# Altium PCB PCB.PcbDoc
Units mil, origin at the board's own origin, x right, y up, seen from the top; angles counter-clockwise.
Board outline 5050 x 1495 mil, 2 copper layers (Top Layer, Bottom Layer); 100 components, 60 nets, 241 pads, 18 vias.
Unrouted connection lines stored in the file: 150.
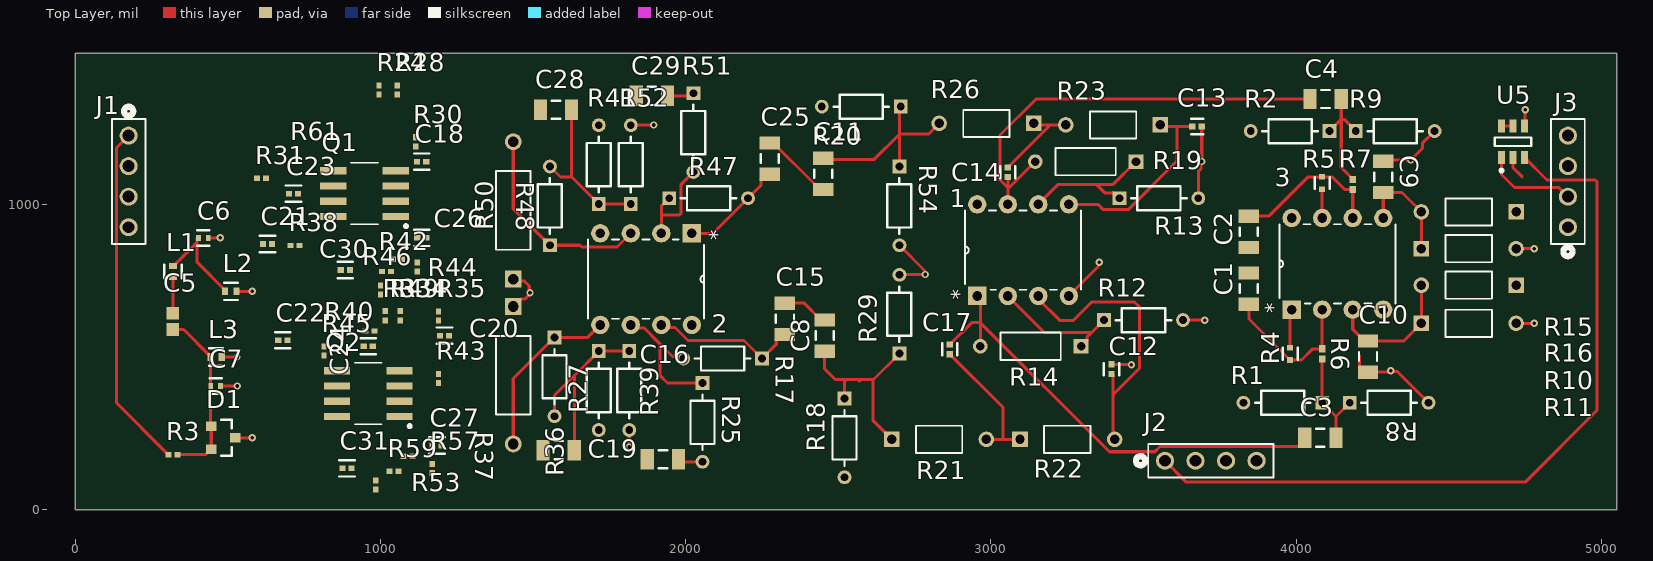
[diagram p0: Top Layer view]
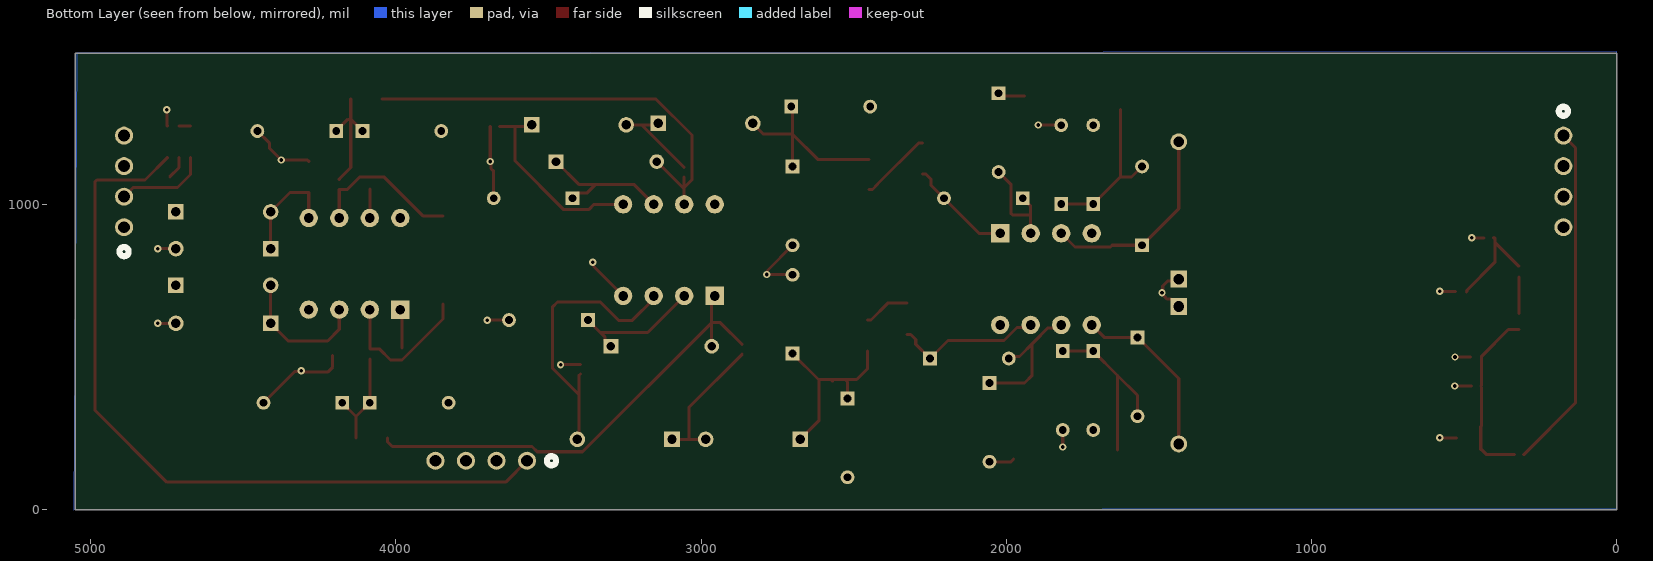
[diagram p1: Bottom Layer view, seen from below]

## Layer stack, top to bottom
Top Solder: solder mask 0.4, Solder Resist, Dk 3.5
Top Layer: signal copper 1.4
Dielectric 1: dielectric 12.6, FR-4, Dk 4.8
Bottom Layer: signal copper 1.4
Bottom Solder: solder mask 0.4, Solder Resist, Dk 3.5

## Board outline
0,0 5050,0 5050,1495 0,1495

## Design rules (kind name [scope] priority, off if disabled: settings)
Clearance [All] p1: gap=10 ignorepadtopadclearanceinfootprint=FALSE except(0: Arc-Hole Track-Hole SMDPad-Hole THPad-Hole Via-Hole Fill-Hole Poly-Hole Region-Hole Text-Hole)
HoleSize [All] p1: absolutevalues=TRUE maxlimit=900 minlimit=12 maxpercent=80.000 minpercent=20.000
MinimumSolderMaskSliver [All] p1: minsoldermaskwidth=1
PolygonConnect [All] p1: connectstyle=Relief reliefconductorwidth=10 reliefentries=4 polygonreliefangle="90 Angle" airgapwidth=10
RoutingVias [All] p1: holewidth=12 width=24 viastyle="Through Hole" minholewidth=12 minwidth=24 maxholewidth=100 maxwidth=200
SilkToSilkClearance [All] p1: silktosilkclearance=0
SilkToSolderMaskClearance [IsPad] p1: minsilkscreentomaskgap=1 clearancetoexposedcopper=TRUE
SolderMaskExpansion [All] p1: expansion=4 istentingtop=FALSE
SupplyNets "Schematic Supply Nets_1" [InNet('GND')] p1: voltage=0.000
SupplyNets "Schematic Supply Nets" [InNet('5V0')] p2: voltage=0.000
Width [All] p1: maxlimit=200 minlimit=10 preferedwidth=10
26 further rules are at their usual default settings.

## Components (designator, comment, footprint, x,y, rotation, side; value= is the part's Value field where it differs from the comment)
1 "LM4562NANOPB" N08E 3305,660 r90 top
2 "LM4562NANOPB" N08E 1670,945 r270 top
3 "LM4562NANOPB" N08E 4335,615 r90 top
C1 "1u" CAPC3216X110X50LL20T25 3845,723.82 r90 top
C2 "1u" CAPC3216X110X50LL20T25 3845,910 r90 top
C3 "1u" CAPC3216X110X50LL20T25 4078.82,235 r0 top
C4 "1u" CAPC3216X110X50LL20T25 4096.18,1345 r180 top
C5 "100p" CAPC1608X90X40ML10T20 320,616.57 r90 top
C6 "390p" FP-GRM155-0_05-MFG 420,890 r0 top
C7 "390p" FP-GRM155-0_05-MFG 460,405 r0 top
C8 "1u" CAPC3216X110X50LL20T25 2455,570 r270 top
C9 "1u" CAPC3216X110X50LL20T25 4285,1090 r90 top
C10 "1u" CAPC3216X110X50LL20T25 4235,501.18 r90 top
C11 "1u" CAPC3216X110X50LL20T25 2450,1100 r270 top
C12 "1.5" FP-C0402-BB-MFG 3395,460 r270 top value="1,500 pF"
C13 "1.5" FP-C0402-BB-MFG 3675,1255 r0 top value="1,500 pF"
C14 "1.5" FP-C0402-BB-MFG 3055,1105 r270 top value="1,500 pF"
C15 "1u" CAPC3216X110X50LL20T25 2325,625 r270 top
C16 "1u" CAPC3216X110X50LL20T25 1925,165 r180 top
C17 "1.5" FP-C0402-BB-MFG 2865,525 r90 top value="1,500 pF"
C18 "0.1u" FP-CL17-IPC_C 1134.9,1140 r0 top
C19 "1u" CAPC3216X110X50LL20T25 1583.82,195 r180 top
C20 "0.1u" FP-CL17-IPC_C 1210,570 r0 top
C21 "0.1u" FP-CL17-IPC_C 629.9,870 r180 top
C22 "0.1u" FP-CL17-IPC_C 680,555 r180 top
C23 "0.1u" FP-CL17-IPC_C 715,1035 r180 top
C24 "0.1u" FP-CL17-IPC_C 959.9,535 r180 top
C25 "1u" CAPC3216X110X50LL20T25 2275,1150 r270 top
C26 "0.1u" FP-CL17-IPC_C 1135.1,890 r0 top
C27 "0.1u" FP-CL17-IPC_C 1185.1,210 r0 top
C28 "1u" CAPC3216X110X50LL20T25 1575,1310 r180 top
C29 "1u" CAPC3216X110X50LL20T25 1888.82,1355 r180 top
C30 "0.1u" FP-CL17-IPC_C 884.9,785 r180 top
C31 "0.1u" FP-CL17-IPC_C 890.1,135 r180 top
D1 "BAT54S-7-F" FP-SOT23-MFG 485,235 r0 top
J1 "PRPC004SAAN-RC" CONN4_PRPC004_SUL 175,1225 r90 top locked
J2 "PRPC004SAAN-RC" CONN4_PRPC004_SUL 3570,160 r180 top locked
J3 "PRPC004SAAN-RC" CONN4_PRPC004_SUL 4890,925 r270 top locked
L1 "2u" FP-LQW15CA_00-MFG 320,780 r90 top
L2 "500n" FP-LQW15CA_00-MFG 510,715 r0 top
L3 "500n" FP-LQW15CA_00-MFG 461.3,500 r0 top
Q1 "HFA3101BZ" M8_15_MFG 947.64,1035 r180 top
Q2 "HFA3101BZ" M8_15_MFG 960,380 r180 top
R1 "CF18JT10K0" FP-CF18-MFG 3955.87,350 r180 top value=10kΩ
R2 "CF18JT10K0" FP-CF18-MFG 3980,1240 r180 top value=10kΩ
R3 "24" RESC1005X40X25LL05T10 319.76,180 r0 top
R4 "ERA-2AEB332X" FP-ERA2A-MFG 3980,510 r270 top
R5 "ERA-2AEB332X" FP-ERA2A-MFG 4085,1070 r90 top
R6 "100" RESC1005X40X25NL05T10 4085,510 r90 top
R7 "100" RESC1005X40X25NL05T10 4185,1065 r90 top
R8 "CF18JT10K0" FP-CF18-MFG 4304.13,350 r0 top value=10kΩ
R9 "CF18JT10K0" FP-CF18-MFG 4324.13,1240 r0 top value=10kΩ
R10 "CF18JT1K00" STA_CF18_STP 4720,735 r180 top
R11 "CF18JT1K00" STA_CF18_STP 4410,610 r0 top
R12 "CF18JT10K0" FP-CF18-MFG 3499.71,620.81 r0 top value=10kΩ
R13 "CF18JT10K0" FP-CF18-MFG 3550,1020 r0 top value=10kΩ
R14 "CMF505K9000FHEB" RES_CMF50_VIS 3295,535 r180 top
R15 "CF18JT1K00" STA_CF18_STP 4720,975 r180 top
R16 "CF18JT1K00" STA_CF18_STP 4410,855 r0 top
R17 "CF18JT10K0" FP-CF18-MFG 2120.87,495 r180 top value=10kΩ
R18 "CF18JT10K0" FP-CF18-MFG 2520,235 r270 top value=10kΩ
R19 "CMF505K9000FHEB" RES_CMF50_VIS 3475,1140 r180 top
R20 "CF18JT10K0" FP-CF18-MFG 2575,1320 r180 top value=10kΩ
R21 "CF18JT1K00" STA_CF18_STP 2675,230 r0 top
R22 "CF18JT1K00" STA_CF18_STP 3095,230 r0 top
R23 "CF18JT1K00" STA_CF18_STP 3555,1260 r180 top
R24 "270" RESC1005X40X25LL05T10 995,1375 r270 top
R25 "CF18JT10K0" FP-CF18-MFG 2055,285.87 r270 top value=10kΩ
R26 "CF18JT1K00" STA_CF18_STP 3140,1265 r180 top
R27 "CF18JT10K0" FP-CF18-MFG 1715,390 r270 top value=10kΩ
R28 "270" RESC1005X40X25LL05T10 1055,1375.24 r90 top
R29 "CF18JT10K0" FP-CF18-MFG 2700,640 r90 top value=10kΩ
R30 "270" RESC1005X40X25LL05T10 1115,1205 r90 top
R31 "270" RESC1005X40X25LL05T10 610,1085 r180 top
R33 "270" RESC1005X40X25LL05T10 1015,635 r270 top
R34 "270" RESC1005X40X25LL05T10 1065,635 r270 top
R35 "270" RESC1005X40X25LL05T10 1190,634.76 r90 top
R36 "CF18JT10K0" FP-CF18-MFG 1570,435 r270 top value=10kΩ
R37 "CF14JT100K" STA_CF14_STP 1435,665 r270 top
R38 "270" RESC1005X40X25LL05T10 719.76,865 r0 top
R39 "CF18JT10K0" FP-CF18-MFG 1815,390 r270 top value=10kΩ
R40 "270" RESC1005X40X25LL05T10 965.24,585 r0 top
R41 "CF18JT10K0" FP-CF18-MFG 1715,1130 r90 top value=10kΩ
R42 "270" RESC1005X40X25LL05T10 1055,820 r180 top
R43 "270" RESC1005X40X25LL05T10 1190,430 r90 top
R44 "270" RESC1005X40X25LL05T10 1120,794.76 r90 top
R45 "270" RESC1005X40X25LL05T10 815,520 r270 top
R46 "270" RESC1005X40X25LL05T10 1020,780 r0 top
R47 "CF18JT10K0" FP-CF18-MFG 2075,1020 r0 top value=10kΩ
R48 "CF18JT10K0" FP-CF18-MFG 1555,995 r90 top value=10kΩ
R49 "270" RESC1005X40X25LL05T10 1000,720 r90 top
R50 "CF14JT100K" STA_CF14_STP 1435,755 r90 top
R51 "CF18JT10K0" FP-CF18-MFG 2025,1235 r270 top value=10kΩ
R52 "CF18JT10K0" FP-CF18-MFG 1820,1130 r90 top value=10kΩ
R53 "270" RESC1005X40X25LL05T10 1090,175 r0 top
R54 "CF18JT10K0" FP-CF18-MFG 2700,995 r270 top value=10kΩ
R57 "270" RESC1005X40X25LL05T10 1170,135 r90 top
R59 "270" RESC1005X40X25LL05T10 1045,125 r0 top
R61 "270" RESC1005X40X25LL05T10 985,79.76 r90 top
U5 "TPS22810TDBVRQ1" FP-DBV0006A-MFG 4710,1205 r90 top locked

## Footprints (in the part's own frame and the unit in brackets; to place one, negate y for a bottom-side part, rotate by r counter-clockwise, add the part's x,y. Pads: shape width x height; smd on the part's side, far side on the other; paste and mask are expansions set on the pad)
CAPC1608X90X40ML10T20 [mm] "Chip Capacitor, 2-Leads, Body 1.7x0.9mm, IPC Low Density"
  rect 1.05x1.05 smd: 1(-0.675,0) 2(0.675,0)
  body extent -0.85,-0.45 0.85,0.45, height 0.9
CAPC3216X110X50LL20T25 [mm] "Chip Capacitor, 2-Leads, Body 3.20x1.60mm, IPC High Density"
  rect 1.1x1.7 smd: 1(-1.3,0) 2(1.3,0)
  silkscreen extent -0.35,-0.75 0.35,0.75, body extent -1.7,-0.9 1.7,0.9, height 1.1
CONN4_PRPC004_SUL [mil]
  round 59 / inner round 60 / far side round 59 hole 39 paste-99999 mask+0: 1(0,0) 2(-100,0) 3(-200,0) 4(-300,0)
  silkscreen extent -355,-55 95,55
FP-C0402-BB-MFG [mm]
  rect 0.52x0.52 smd paste+0 mask+0: 1(-0.4,0) 2(0.4,0)
  silkscreen extent -0.5,-0.64 0.5,0.64, body extent -0.8,-0.4 0.8,0.4, height 0.25
FP-CF18-MFG [mm]
  rect 1.15x1.15 hole 0.65 paste-2539.97 mask+0: 1(-3.28,0)
  round 1.15 hole 0.65 paste-2539.97 mask+0: 2(3.28,0)
  silkscreen extent -2.3,-1 2.3,1, body extent -3.96,-1.1 3.96,1.1, height 0.25
FP-CL17-IPC_C [mil]
  rect 20.29x18.6 smd paste+0 mask+0: 1(-14.9,0) 2(14.9,0)
  silkscreen extent -25,-27 25,27, body extent -29,-15 29,15, height 10
FP-DBV0006A-MFG [mm]
  rrect17% 1.1x0.6 smd paste+0 mask+0: 1(-1.3,0.95) 2(-1.3,0) 3(-1.3,-0.95) 4(1.3,-0.95) 5(1.3,0) 6(1.3,0.95)
  silkscreen extent -2.52,-1.53 0.35,1.53, body extent -1.95,-1.78 1.95,1.78, height 0.25
FP-ERA2A-MFG [mm]
  rect 0.475x0.5 smd paste+0 mask+0: 1(-0.512,0) 2(0.512,0)
  silkscreen extent -0.5,-0.63 0.5,0.63, body extent -0.85,-0.4 0.85,0.4, height 0.25
FP-GRM155-0_05-MFG [mm]
  rect 0.4x0.5 smd paste+0 mask+0: 1(-0.4,0) 2(0.4,0)
  silkscreen extent -0.5,-0.65 0.5,0.65, body extent -0.7,-0.38 0.7,0.38, height 0.25
FP-LQW15CA_00-MFG [mm]
  rect 0.5x0.64 smd paste+0 mask+0: 1(-0.475,0) 2(0.475,0)
  silkscreen extent -0.56,-0.73 0.56,0.73, body extent -0.82,-0.42 0.82,0.42, height 0.25
FP-SOT23-MFG [mm]
  rect 0.9x0.8 smd paste+0 mask+0: 1(-1,0.95) 2(-1,-0.95) 3(1,0)
  silkscreen extent -0.18,-1.5 0.7,1.5, body extent -1.55,-1.6 1.55,1.6, height 0.25
M8_15_MFG [mm] "Recommended Land Pattern"
  rect 2.2x0.6 smd: 1(-2.6,1.905) 2(-2.6,0.635) 3(-2.6,-0.635) 4(-2.6,-1.905) 5(2.6,-1.905) 6(2.6,-0.635) 7(2.6,0.635) 8(2.6,1.905)
  silkscreen extent -3.58,-2.56 1.13,2.83, body extent -3.8,-2.75 3.8,2.75, height 0.25
N08E [mil]
  rect 60x60 / inner round 60 / far side rect 60x60 hole 32 paste-99999 mask-30: 1(40,350)
  round 60 hole 32 paste-99999 mask-30: 2(40,250) 3(40,150) 4(40,50) 5(340,50) 6(340,150) 7(340,250) 8(340,350)
  silkscreen extent 60,10 320,390, body extent 20,15 340,395, height 215
RES_CMF50_VIS [mil]
  rect 48x48 / inner round 60 / far side rect 48x48 hole 28 paste-99999 mask+0: 1(0,0)
  round 48 / inner round 60 / far side round 48 hole 28 paste-99999 mask+0: 2(330,0)
  silkscreen extent 66,-45 264,45, body extent -9,-40 339,40, height 80
RESC1005X40X25LL05T10 [mm] "Chip Resistor, 2-Leads, Body 1.00x0.50mm, IPC High Density"
  rect 0.5x0.45 smd: 1(-0.375,0) 2(0.375,0)
  body extent -0.53,-0.27 0.53,0.28, height 0.4
RESC1005X40X25NL05T10 [mm] "Chip Resistor, 2-Leads, Body 1.00x0.50mm, IPC Medium Density"
  rect 0.6x0.55 smd: 1(-0.425,0) 2(0.425,0)
  body extent -0.53,-0.27 0.53,0.28, height 0.4
STA_CF14_STP [mil]
  rect 55x55 / inner round 60 / far side rect 55x55 hole 35 paste-99999 mask+0: 1(0,0)
  round 55 / inner round 60 / far side round 55 hole 35 paste-99999 mask+0: 2(450,0)
  silkscreen extent 96,-56 354,57, body extent -12,-51 462,51, height 103
STA_CF18_STP [mil]
  rect 51x51 / inner round 60 / far side rect 51x51 hole 31 paste-99999 mask+0: 1(0,0)
  round 51 / inner round 60 / far side round 51 hole 31 paste-99999 mask+0: 2(310,0)
  silkscreen extent 79,-44 231,45, body extent -11,-39 321,39, height 79

## Part data
1 2 3: "No Description Available", Mfr_Name="Texas Instruments", RefDes=RefDes, Type=Type
C1 C2 C3 C4 C8 C9 C10 C11 C15 C16 C19 C25 C28 C29: library part CMP-2000-06011-1, "Chip Capacitor, 1 uF, +/- 10%, 50 V, -55 to 125 degC, 1206 (3216 Metric), RoHS, Tape and Reel", Capacitance=1uF, Capacitance - nF=1000nF, Case Code - in=1206, Case Code - mm=3216, Case Height=1mm, Case Length=3.2mm, Case Width=1.6mm, Dielectric=X7R, Manufacturer=Kemet, Maximum Operating Temperature=+125C, Minimum Operating Temperature=-55C, Operating Temperature Range=-55Cto+125C, Package / Case=1206(3216metric), Package Description="2-Pin Surface Mount Device, Body 3.2 x 1.6 mm", Temperature Coefficient / Code=+/-15%, Tolerance=10%, Voltage Rating=50V, Brand=Kemet, Class=Class1, Datasheet URL=http://www.kemet.com/docfinder?Partnumber=C1206C105K5RACTU, Datasheet Version=02/2016, Dimensions=1.6mmWx3.2mmLx1mmH, Factory Pack Quantity=2500, Manufacturer URL=http://www.kemet.com/, Mounting Technology=SurfaceMount, Package Reference=1206, Packaging=Reel, Product=GeneralTypeMLCCs, Product Category=MultilayerCeramicCapacitorsMLCC-SMD/SMT, RoHS=Details, Series=C1206C, Termination Style=SMD/SMT, Type=SMDMLCCX7R6.3-250VDCCommericalGrade, Voltage Rating DC=50V
C5: library part CMP-2100-03594-1, "Chip Capacitor, 100 pF, +/- 5%, 50 V, -55 to 125 degC, 0603 (1608 Metric), RoHS, Tape and Reel", Capacitance=100pF, Case Code (Imperial)=0603, Case Code (Metric)=1608, Dielectric=C0G, Insulation Resistance=100GR, Manufacturer=Yageo, Max Operating Temperature=125degC, Min Operating Temperature=-55degC, Package Description="2-Pin Surface Mount Device, Body 1.6 x 0.8 mm", Package Quantity=1, Temperature Coefficient=30ppm/degC, Tolerance=5%, Voltage=50V, Case/Package=0603, Composition=Ceramic, Datasheet URL=http://www.yageo.com/documents/recent/UPY-GP_NP0_16V-to-50V_14.pdf, Datasheet Version="Rev. 14, 07/2016", Depth=0.8mm, Height=0.8mm, Lead Free=LeadFree, Length=1.6mm, Manufacturer URL=http://www.yageo.com/, Mount=SurfaceMount, Number of Pins=2, Package Reference=0603, Packaging=TapeandReel, Radiation Hardening=No, REACH SVHC=Unknown, RoHSCompliant=True, Termination=SMD/SMT, Thickness=0.035inch, Voltage Rating=50V, Voltage Rating (DC)=50V, Width=0.8mm
C6 C7: library part CMP-2008-04345-2, "Chip Multilayer Ceramic Capacitors for General Purpose, 0402, 390pF, C0G, 30ppm/°C, 5%, 50V", Capacitance=390pF, Case Code (Imperial)=0402, Case Code (Metric)=1005, Dielectric=C0G, Max Operating Temperature=125°C, Min Operating Temperature=-55°C, Package Quantity=1, Temperature Coefficient=30ppm/°C, Tolerance=5%, Voltage=50V, Case/Package=0402, Depth=0.5mm, Height=0.5mm, Lead Free="Lead Free", Length=1mm, Material=Ceramic, Mount="Surface Mount", Packaging="Tape and Reel", Radiation Hardening=No, REACH SVHC="No SVHC", Termination=SMD/SMT, Thickness=0.022inch, Voltage Rating=50V, Voltage Rating (DC)=50V, Width=0.02inch
C12 C13 C14 C17: library part CMP-2008-03106-2, "CAP CER 1500PF 50V NP0 0402", Capacitance="1,500 pF", Manufacturer=Kemet, Manufacturer Part Number=C0402C152J5GACTU, Package=C0402-BB, Temperature="-55°C to +125°C", Temperature Characteristic=C0G, Temperature Coefficient=15%, Temperature Range High=+125°C, Temperature Range Low=-55°C, Tolerance=0.05, Voltage Rating="50 V", Automotive=No, Category=Cap, ComponentLink2Description=Datasheet, ComponentLink2URL=https://content.kemet.com/datasheets/KEM_C1002_X7R_SMD.pdf, Device Class L1="Passive Components", Device Class L2=Capacitors, Device Class L3="Ceramic Capacitors", Digikey Description="CAP CER 1500PF 50V NP0 0402", Height=0.55mm, Ipc Land Pattern Name=CAPC10050X50, Lead Free=Yes, Material=Ceramic, Mouser Description="Multilayer Ceramic Capacitors MLCC - SMD/SMT 50V 0.0015uF 5% C0G", Octopart=https://octopart.com/c0402c152j5gactu-kemet-12793166, RoHS=TRUE
C18 C20 C21 C22 C23 C24 C26 C27 C30 C31: library part CMP-13271-001069-1, "Cap Ceramic 100nF 10V X7R ±10% SMD 0402 +125°C Paper T/R", Capacitance=100nF, Case Code (Imperial)=0402, Case Code (Metric)=1005, Dielectric=X7R, Max Operating Temperature=125°C, Min Operating Temperature=-55°C, Package Quantity=1, Tolerance=10%, Voltage Rating=10V, Case/Package=0402, Contact Plating=Tin, Depth=0.5mm, Height=0.5mm, Length=1mm, Mount="Surface Mount", Packaging="Tape and Reel", Radiation Hardening=No, Thickness=0.022inch, Width=0.02inch
D1: library part CMP-1667-00006-2, "DIODE ARRAY SCHOTTKY 30V SOT23-3", Average Rectified Current=200mA, Capacitance=10pF, Case/Package=SOT-23, Forward Voltage=800mV, Max Forward Surge Current (Ifsm)=600mA, Max Operating Temperature=150°C, Max Power Dissipation=200mW, Max Repetitive Reverse Voltage (Vrrm)=30V, Min Operating Temperature=-65°C, Package Quantity=3000, Peak Reverse Current=2uA, Contact Plating=Tin, Current Rating=200mA, Forward Current=200mA, Height=1mm, Lead Free="Lead Free", Length=2.9mm, Max Reverse Voltage (DC)=30V, Mount="Surface Mount", Number of Pins=3, Packaging="Tape and Reel", Peak Non-Repetitive Surge Current=600mA, Power Dissipation=200mW, Power Rating=200mW, Radiation Hardening=No, REACH SVHC="No SVHC", Reverse Recovery Time=5ns, Termination=SMD/SMT, Voltage Rating (DC)=30V, Weight=0.000282oz, Width=1.3mm
J1 J2 J3: "No Description Available", Mfr_Name=Sullins, RefDes=RefDes, Type="Headers, Male Pins"
L1: library part CMP-06042-013572-1, "Wire Wound Ferrite Inductor for General Circuits 2000nH ±10% 130mA 3.2Ω 0402 (1005)", Case/Package=Nonstandard, Current Rating=130mA, DC Resistance (DCR)=3.2R, Inductance=2uH, Max Operating Temperature=125°C, Min Operating Temperature=-40°C, Resistor Type=Wirewound, Self Resonant Frequency=120MHz, Test Frequency=10MHz, Tolerance=10%, Core Material=Ferrite, Height - Seated (Max)=0.026inch, Length=0.04inch, Mount="Surface Mount", Packaging="Tape and Reel", Shielding=Unshielded, Width=0.022inch
L2 L3: library part CMP-06042-006025-1, "Wire Wound Ferrite Inductor for General Circuits 500nH ±5% 270mA 0.97Ω 0402 (1005)", Case/Package=Nonstandard, Current Rating=270mA, DC Resistance (DCR)=970mR, Inductance=500nH, Max Operating Temperature=125°C, Min Operating Temperature=-40°C, Resistor Type=Wirewound, Self Resonant Frequency=900MHz, Test Frequency=10MHz, Tolerance=5%, Core Material=Ferrite, Height - Seated (Max)=0.026inch, Length=0.04inch, Mount="Surface Mount", Packaging="Cut Tape", Shielding=Unshielded, Width=0.022inch
Q1 Q2: library part CMP-00572-88252381-1, "HFA3096 Series NPN 12 Vce 10 Ghz UHF Transistor Array - SOIC-8", Case/Package=SOIC, Collector Base Voltage (VCBO)=12V, Collector Emitter Breakdown Voltage=8V, Continuous Collector Current=30mA, Emitter Base Voltage (VEBO)=5.5V, Manufacturer Lifecycle Status=ACTIVE, Max Frequency=10GHz, Max Operating Temperature=85°C, Min Operating Temperature=-40°C, Bandwidth=900MHz, Collector Emitter Voltage (VCEO)=8V, ComponentLink1Description="Manufacturer's Website", ComponentLink1URL=http://www.renesas.com, ComponentLink2Description="Datasheet URL", ComponentLink2URL=https://octopart.com/cad-content/api/get-model-datasheet/15189/88252381, ComponentLink3Description="Manufacturer's Package Drawing", ComponentLink3URL=https://www.renesas.com/en/document/psc/m815-8-lead-narrow-body-small-outline-plastic-package, Contact Plating=Tin, Current Rating=30mA, Gain Bandwidth Product=10GHz, Height=0m, HelpURL=https://octopart.com/cad-content/api/get-model-datasheet/15189/88252381, Lead Free="Lead Free", Length=4.9mm, Lifecycle Status=Production, Max Collector Current=30mA, Mount="Surface Mount", Noise Figure=3.5dB, Number of Pins=8, Packaging=Bulk, Pitch=1.3mm, Polarity=NPN, Radiation Hardening=No, REACH SVHC="No SVHC", RoHS=Compliant, Schedule B=8542330000, Transition Frequency=10GHz, Voltage Rating (DC)=8V, Width=3.9mm
R1 R2 R8 R9 R12 R13 R17 R18 R20 R25 R27 R29 R36 R39 R41 R47 R48 R51 R52 R54: library part CMP-26528-000002-1, "RES 10K OHM 1/8W 5% CF AXIAL", Manufacturer="Stackpole Electronics", Package=CF18, Power Rating=0.125W, Resistance=10kΩ, Temperature="-55°C to +155°C", Temperature Coefficient=0-500ppm/°C, Temperature Range High=+155°C, Temperature Range Low=-55°C, Tolerance=5%, Voltage Rating=250V, Automotive=No, Category=Res, ComponentLink2Description=Datasheet, ComponentLink2URL=http://www.seielect.com/Catalog/SEI-CF_CFM.pdf, Composition="Carbon Film", Device Class L1="Passive Components", Device Class L2=Resistors, Device Class L3="Through-Hole Resistors", Digikey Description="RES 10K OHM 1/8W 5% CF AXIAL", Height=2mm, Ipc Land Pattern Name=RESAD656W65L360D200, Lead Free=Yes, Manufacturer Part Number=CF18JT10K0, Octopart=https://octopart.com/cf18jt10k0-stackpole+electronics-19205642, RoHS=TRUE, Series=CF
R3: library part CMP-1011-00035-2, Manufacturer=Yageo, Part Number=RC0402JR-0724RL
R4 R5: library part CMP-2002-05884-2, Case Code (Imperial)=0402, Case Code (Metric)=1005, Max Operating Temperature=155°C, Max Power Dissipation=63mW, Min Operating Temperature=-55°C, Resistance=3.3kΩ, Temperature Coefficient=25ppm/°C, Tolerance=0.1%, Voltage Rating=25V, Case/Package=0402, Composition="Thin Film", Contact Plating=Tin, Depth=500µm, Height=350µm, Lead Free="Lead Free", Length=1mm, Lifecycle Status=Production, Military Standard=Not, Mount="Surface Mount", NexarPartId=9251384, Number of Pins=2, Number of Terminations=2, Packaging="Cut Tape", Power Rating=63mW, Radiation Hardening=No, REACH SVHC="No SVHC", RoHS=Compliant, Schedule B="8533210045, 8533210045", Termination=SMD/SMT, Voltage Rating (DC)=25V, Weight=793.786648µg, Width=500µm
R6 R7: library part CMP-2002-07914-1, Manufacturer="Yageo / Phycomp", Part Number=RC0402JR-07100RL
R10 R11 R15 R16 R21 R22 R23 R26 R37 R50: "No Description Available", Mfr_Name="Stackpole International"
R14 R19: "No Description Available", Mfr_Name=Vishay
R24 R28 R30 R31 R33 R34 R35 R38 R40 R42 R43 R44 R45 R46 R49 R53 R57 R59 R61: library part CMP-2002-07003-1, Manufacturer="Yageo / Phycomp", Part Number=RC0402FR-07270RL
U5: library part CMP-04910-000007-2, "IC PWR SWITCH N-CHAN 1:1 SOT23-6", Case/Package=SOT-23-6, Max Operating Temperature=105°C, Max Output Current=2A, Max Supply Voltage=18V, Min Operating Temperature=-40°C, Min Supply Voltage=2.7V, Package Quantity=3000, Fault Protection="Over Temperature", Interface=On/Off, Number of Channels=1, Number of Outputs=1, Output Configuration="High Side", Packaging="Cut Tape", RoHS Compliant=Yes, Series=TPS22810-Q1, Weight=0.000801oz

## Via types
v1: diameter 24, hole 12, Top Layer to Bottom Layer, 18 vias

## Nets (pads, with @x,y where several pads share a name; then routed paths per layer and width w, separated by ;. In a path a pad name is that pad's centre, name@x,y a point inside that pad or via, vN(x,y) a via of type N, cw(c..) or ccw(c..) an arc to the next point about the centre after c; other vN are vias at no path point)
5V0: 1.8 2.8 3.8 R1.2 R2.2 R10.1 R15.1 R18.2 R20.2 R24.1 R27.2 R28.1 R30.2 R33.1 R34.1 R35.2 R41.2 U5.5 U5.6 | length 37.4
  Top Layer w10: U5.6 U5.5
5V_POWER: J3.2 U5.1 | length 303.8
  Top Layer w10: U5.1 4672.6,1097.4 4715,1055 4860,1055 J3.2
GND: 1.4 2.4 3.4 C6.2 C7.2 C9.2 C10.1 C12.1 C13.2 C18.2 C20.2 C23.2 C24.2 C26.2 C27.2 D1.3 J1.3 J1.4 J2.4 J3.4 L2.2 L3.2 R8.2 R9.2 R11.2 R12.2 R13.2 R16.2 R29.2 R37.1 R39.2 R44.1 R49.1 R50.1 R52.2 R54.2 R57.1 R61.1 U5.2 U5.4 | length 2077.4
  Top Layer w10: C6.2 v1(475,890) ; C7.2 v1(530.75,405) ; L3.2 v1(530,500) ; D1.3@526.34,235 D1.3 v1(580,235) ; L2.2 v1(580,715) ; R37.1 1460,690 1474.15,690 1477.5,693.35 1477.5,693.71 1490,706.21 v1(1490,710) 1487.32,712.68 1487.32,732.68 1471.64,748.36 1441.64,748.36 R50.1 ; v1(1815,205) R39.2 ; R52.2 1820.43,1259.57 1894.57,1259.57 v1(1895,1260) ; R29.2 2700.43,769.57 2784.57,769.57 v1(2785,770) 2782.32,772.68 2782.32,783.54 R54.2 ; 1.4 3352.32,797.32 3352.32,807.32 v1(3355,810) ; C12.1 3395.37,475.37 3459.63,475.37 v1(3460,475) ; R12.2 3629.25,620.41 3699.59,620.41 v1(3700,620) ; R13.2 3679.13,1108.37 3687.7,1116.94 3687.7,1137.7 v1(3690.37,1140.37) 3690.37,1254.63 C13.2 ; 4206.54,504.5 4206.54,466.65 4223.19,450 C10.1 4301.21,450 4306.21,455 v1(4310,455) 4312.68,452.32 4330.95,452.32 R8.2 ; C9.2 4288.82,1145 v1(4375,1145) 4413.05,1183.05 4413.05,1199.78 R9.2 ; U5.2 4710,1120 4740,1090 ; R11.2 v1(4780,610) ; R16.2 v1(4780,855) ; U5.4 4748.7,1257.48 4748.7,1308.7 v1(4750,1310)
IF_0: C8.1 C15.1 | length 152.8
  Top Layer w10: C15.1 2388.19,676.18 2443.19,621.18 C8.1
IF_0_1: C16.2 Q1.5 R28.2
IF_0_2: C19.2 Q1.6 R24.2
IF_90: C11.2 C25.1 | length 238.7
  Top Layer w10: C25.1 2286.81,1201.18 2421.54,1066.46 2421.54,1065.47 2438.19,1048.82 C11.2
IF_90_1: C29.2 Q2.5 R34.2
IF_90_2: C28.2 Q2.6 R33.2
IF_L0: 1.1 C3.1 C17.2 R14.2 | length 1562.5
  Top Layer w10: C17.2 2936.75,612.5 2965,612.5 ; 1.1 2965,690 2965,612.5 ; R14.2 2965,612.5 ; C3.1 4027.64,223.19 4010.98,206.54 3553.6,206.54 3536.57,189.5 3388,189.5 2965,612.5
IF_L90: 1.7 C4.2 C14.2 R19.2 | length 1461
  Top Layer w10: 1.7 3055,1055 ; C14.2 3055,1055 ; R19.2 3060,1055 3055,1055 ; C4.2 3147.79,1345 3029.76,1226.98 3029.76,1080.24 3055,1055
L0_F1_0: C30.2 J2.2
L0_F1_90: C31.2 J2.3
Net1_2: 1.2 R12.1 R14.1 | length 450.5
  Top Layer w10: 1.2 3174.88,580.12 3329.88,580.12 ; R14.1 3314,554 3314,564.24 3329.88,580.12 ; R12.1 3374.19,620.81 3375,620 3369.76,620 3329.88,580.12
Net1_3: 1.3 C12.2 R22.2 | length 943.5
  Top Layer w10: 1.3 3155,690 3225,620 3270,620 3330,680 3470,680 3487,663 3487,463.82 3400,376.82 ; C12.2 3400,439.25 3400,376.82 ; R22.2 3400,235 3400,376.82
Net1_5: 1.5 C13.1 R23.1 | length 647.2
  Top Layer w10: 1.5 3350.3,1000 3367.94,982.36 3449.72,982.36 3609.63,1142.27 3609.63,1255 ; R23.1 3560,1255 3609.63,1255 ; C13.1 3609.63,1255
Net1_6: 1.6 R13.1 R19.1 | length 472.6
  Top Layer w10: 1.6 3220.28,1065.28 3345,1065.28 ; R13.1 3403.23,1037.64 3372.65,1037.64 3345,1065.28 ; R19.1 3400.28,1065.28 3345,1065.28
Net2_1: 2.1 C25.2 R47.2 | length 346.9
  Top Layer w10: 2.1 2089.13,905 R47.2 2246.54,1062.4 2246.54,1082.16 2263.19,1098.82 C25.2
Net2_2: 2.2 R47.1 R51.2 | length 344.7
  Top Layer w10: 2.2 1920,965 ; R47.1 1920,994.13 1920,965 ; R51.2 1985,1065.87 1985,970.86 1979.14,965 1920,965
Net2_3: 2.3 R48.1 R50.2 | length 680.9
  Top Layer w10: R50.2@1439.23,1200.77 R50.2 1435,985.87 R48.1 1652.71,865.87 1658.57,860 1775,860 2.3
Net2_5: 2.5 R36.1 R37.2 | length 572
  Top Layer w10: R37.2 1435,429.13 R36.1 1679.13,564.13 2.5
Net2_6: 2.6 R17.2 R25.1 | length 478.3
  Top Layer w10: 2.6 1829.57,595.43 1863.1,595.43 1909.94,548.59 ; R17.2 1984.98,501.75 1956.78,501.75 1909.94,548.59 ; R25.1 1940,415 1915,440 1915,543.53 1909.94,548.59
Net2_7: 2.7 C15.2 R17.1 | length 492.4
  Top Layer w10: 2.7 1928.64,596.36 1965,596.36 2007.33,554.04 2190.96,554.04 R17.1 2296.54,541.54 2296.54,557.16 2313.19,573.82 C15.2
Net3_1: 3.1 R4.1 | length 126.9
  Top Layer w10: R4.1 3980,650 3.1
Net3_2: 3.2 C1.1 R4.2 R6.2 | length 487.6
  Top Layer w10: C1.1 3845,624.33 3979.51,489.82 R4.2 4016.88,489.82 4053.79,526.73 R6.2 3.2
Net3_3: 3.3 C10.2 R10.2 R11.1 | length 454.1
  Top Layer w10: 3.3 4185,590.55 4223.19,552.36 C10.2 4352.36,552.36 R11.1 R10.2
Net3_5: 3.5 C9.1 R15.2 R16.1 | length 355.3
  Top Layer w10: 3.5 C9.1 4346.18,1038.82 R15.2 R16.1
Net3_6: 3.6 C2.2 R5.2 R7.1 | length 504.1
  Top Layer w10: C2.2 3909.81,961.18 4038.81,1090.18 R5.2 4116.88,1090.18 4158.79,1048.27 R7.1 3.6
Net3_7: 3.7 R5.1 | length 94.8
  Top Layer w10: 3.7 R5.1
NetC3_2: C3.2 R1.1 R6.1 R8.1 | length 340.5
  Top Layer w10: R6.1 R1.1 4130,305 ; C3.2 4130,305 ; R8.1 4130,305
NetC4_1: C4.1 R2.1 R7.2 R9.1 | length 396.4
  Top Layer w10: R2.1 4147.36,1278.23 ; C4.1 4147.36,1278.23 ; R7.2 4185,1082.72 4147.36,1120.35 4147.36,1278.23 ; R9.1 4156.77,1278.23 4147.36,1278.23
NetC5_2: C5.2 L1.1 | length 118.1
  Top Layer w10: C5.2 L1.1
NetC8_2: C8.2 R18.1 R21.1 R29.1 | length 659.8
  Top Layer w10: C8.2 2455,460.86 2490,425.86 2527.5,425.86 ; R18.1@2522.93,367.07 R18.1 R18.1@2520,370 ; R18.1@2525,375 R18.1@2520,370 ; R18.1@2527.93,367.07 R18.1@2530,369.13 ; 2565,425.87 2570,420.87 ; R21.1 2614.14,290.86 2614.14,425.86 ; R29.1 2614.99,425.86 2614.14,425.86 ; R18.1@2520,370 2520,418.36 2527.5,425.86 ; 2527.5,425.86 2614.14,425.86
NetC11_1: C11.1 R20.1 R26.2 R54.1 | length 626.8
  Top Layer w10: C11.1@2450,1146.18 2616.18,1146.18 2700,1230 ; R54.1 2700,1230 ; R20.1 2700,1315.87 2700,1230 ; R26.2 2795,1230 2700,1230
NetC14_1: C14.1 R23.2 R26.1 | length 304.8
  Top Layer w10: C14.1 3194.25,1260 3195,1260 ; R26.1 3145,1260 3195,1260 ; R23.2 3195,1260
NetC16_1: C16.1 R25.2 | length 82.6
  Top Layer w10: C16.1 1985.31,155.87 R25.2@2055,155.87
NetC17_1: C17.1 R21.2 R22.1 | length 468.8
  Top Layer w10: C17.1 3040,334.25 3040,230 ; R21.2 3040,230 ; R22.1@3090,235 R22.1 3040,230
NetC18_1: C18.1 C21.1 R30.1 R31.2 R38.1
NetC19_1: C19.1 R27.1 R36.2 R39.1 | length 618.1
  Top Layer w10: R36.2 1570,374.13 1635.43,439.57 ; C19.1 1635,439.13 1635.43,439.57 ; R39.1 R27.1 1635.43,439.57
NetC20_1: C20.1 C22.1 R35.1 R40.2 R43.2 R45.1
NetC23_1: C23.1 Q1.7 R31.1
NetC24_1: C24.1 Q2.7 R40.1
NetC26_1: C26.1 R42.2 R44.2 R46.2
NetC27_1: C27.1 R43.1 R53.2 R57.2 R59.2
NetC28_1: C28.1 R41.1 R48.2 R52.1 | length 536.4
  Top Layer w10: R48.2 1589.45,1089.68 1626.18,1089.68 ; C28.1 1626.18,1089.68 ; R52.1 R41.1 1626.18,1089.68
NetC29_1: C29.1 R51.1 | length 88.8
  Top Layer w10: C29.1 2015.87,1355 R51.1
NetC30_1: C30.1 Q1.1 R46.1
NetC31_1: C31.1 Q2.1 R59.1
NetQ1_2: Q1.2 Q1.3 R49.2
NetQ1_4: Q1.4 R42.1
NetQ1_8: Q1.8 R38.2
NetQ2_2: Q2.2 Q2.3 R61.2
NetQ2_4: Q2.4 R53.1
NetQ2_8: Q2.8 R45.2
RX_BPF: C6.1 C21.2 C22.2 L1.2 L2.1 | length 324.2
  Top Layer w10: L1.2 322.76,798.7 396.38,872.32 ; C6.1@399.25,890 399.25,872.32 399.25,809.8 491.3,717.76 L2.1 L2.1@492.78,713.52 ; C6.1@402.78,891.48 C6.1
RX_I: C1.2 J3.1
RX_LIM: C5.1 C7.1 D1.1 D1.2 L3.1 R3.2 | length 578.9
  Top Layer w10: C5.1 355.36,590 442.6,502.76 L3.1 443.43,499.17 443.43,405.83 C7.1 ; R3.2 426.06,180 443.66,197.6 D1.2 D1.1 443.5,274.53 C7.1@443.5,400
RX_Q: C2.1 J3.3
RX_SIG: J1.1 R3.1 | length 1132.6
  Top Layer w10: J1.1 135,1185 135,350 300.16,184.84 300.16,183.86 304.02,180 R3.1
TXEN: J2.1 U5.3 | length 2561.1
  Top Layer w10: J2.1 3640,90 4750,90 4985,325 4985,1074.14 4979.14,1080 4821.22,1080 U5.3
pads on no net: J1.2

## Polygon pours and split planes (outlines as drawn)
GND on Bottom Layer "GND_L02_P002" (solid, pour order 2): 0,1500 5045,1495 5055,0 0,5

## Other copper
Top Layer:
  region: 572.1,1274 572.55,1274 572.55,1273.55 572.1,1273.55

## Silkscreen, mask and mechanical layers (free items; w line width, h text height)
Dimensions:
  lines w10: 0,0 0,1500 5050,1500 5050,5 5055,0 0,0

## Text inside footprints (layer, text, board x,y; h text height)
1: Top Overlay "*" at 2920,687.5 h50 r90; Mechanical 13 "*" at 2920,687.5 h50 r90
2: Top Overlay "*" at 2055,917.5 h50 r270; Mechanical 13 "*" at 2055,917.5 h50 r270
3: Top Overlay "*" at 3950,642.5 h50 r90; Mechanical 13 "*" at 3950,642.5 h50 r90